# Altium PCB ROV_Voltage_Switch_1.1.PcbDoc (part 3 of 3)
Units mm, origin at the board's own origin, x right, y up, seen from the top; angles counter-clockwise.
Board outline 250 x 141 mm, 2 copper layers (Top Layer, Bottom Layer); 262 components, 176 nets, 724 pads, 155 vias.
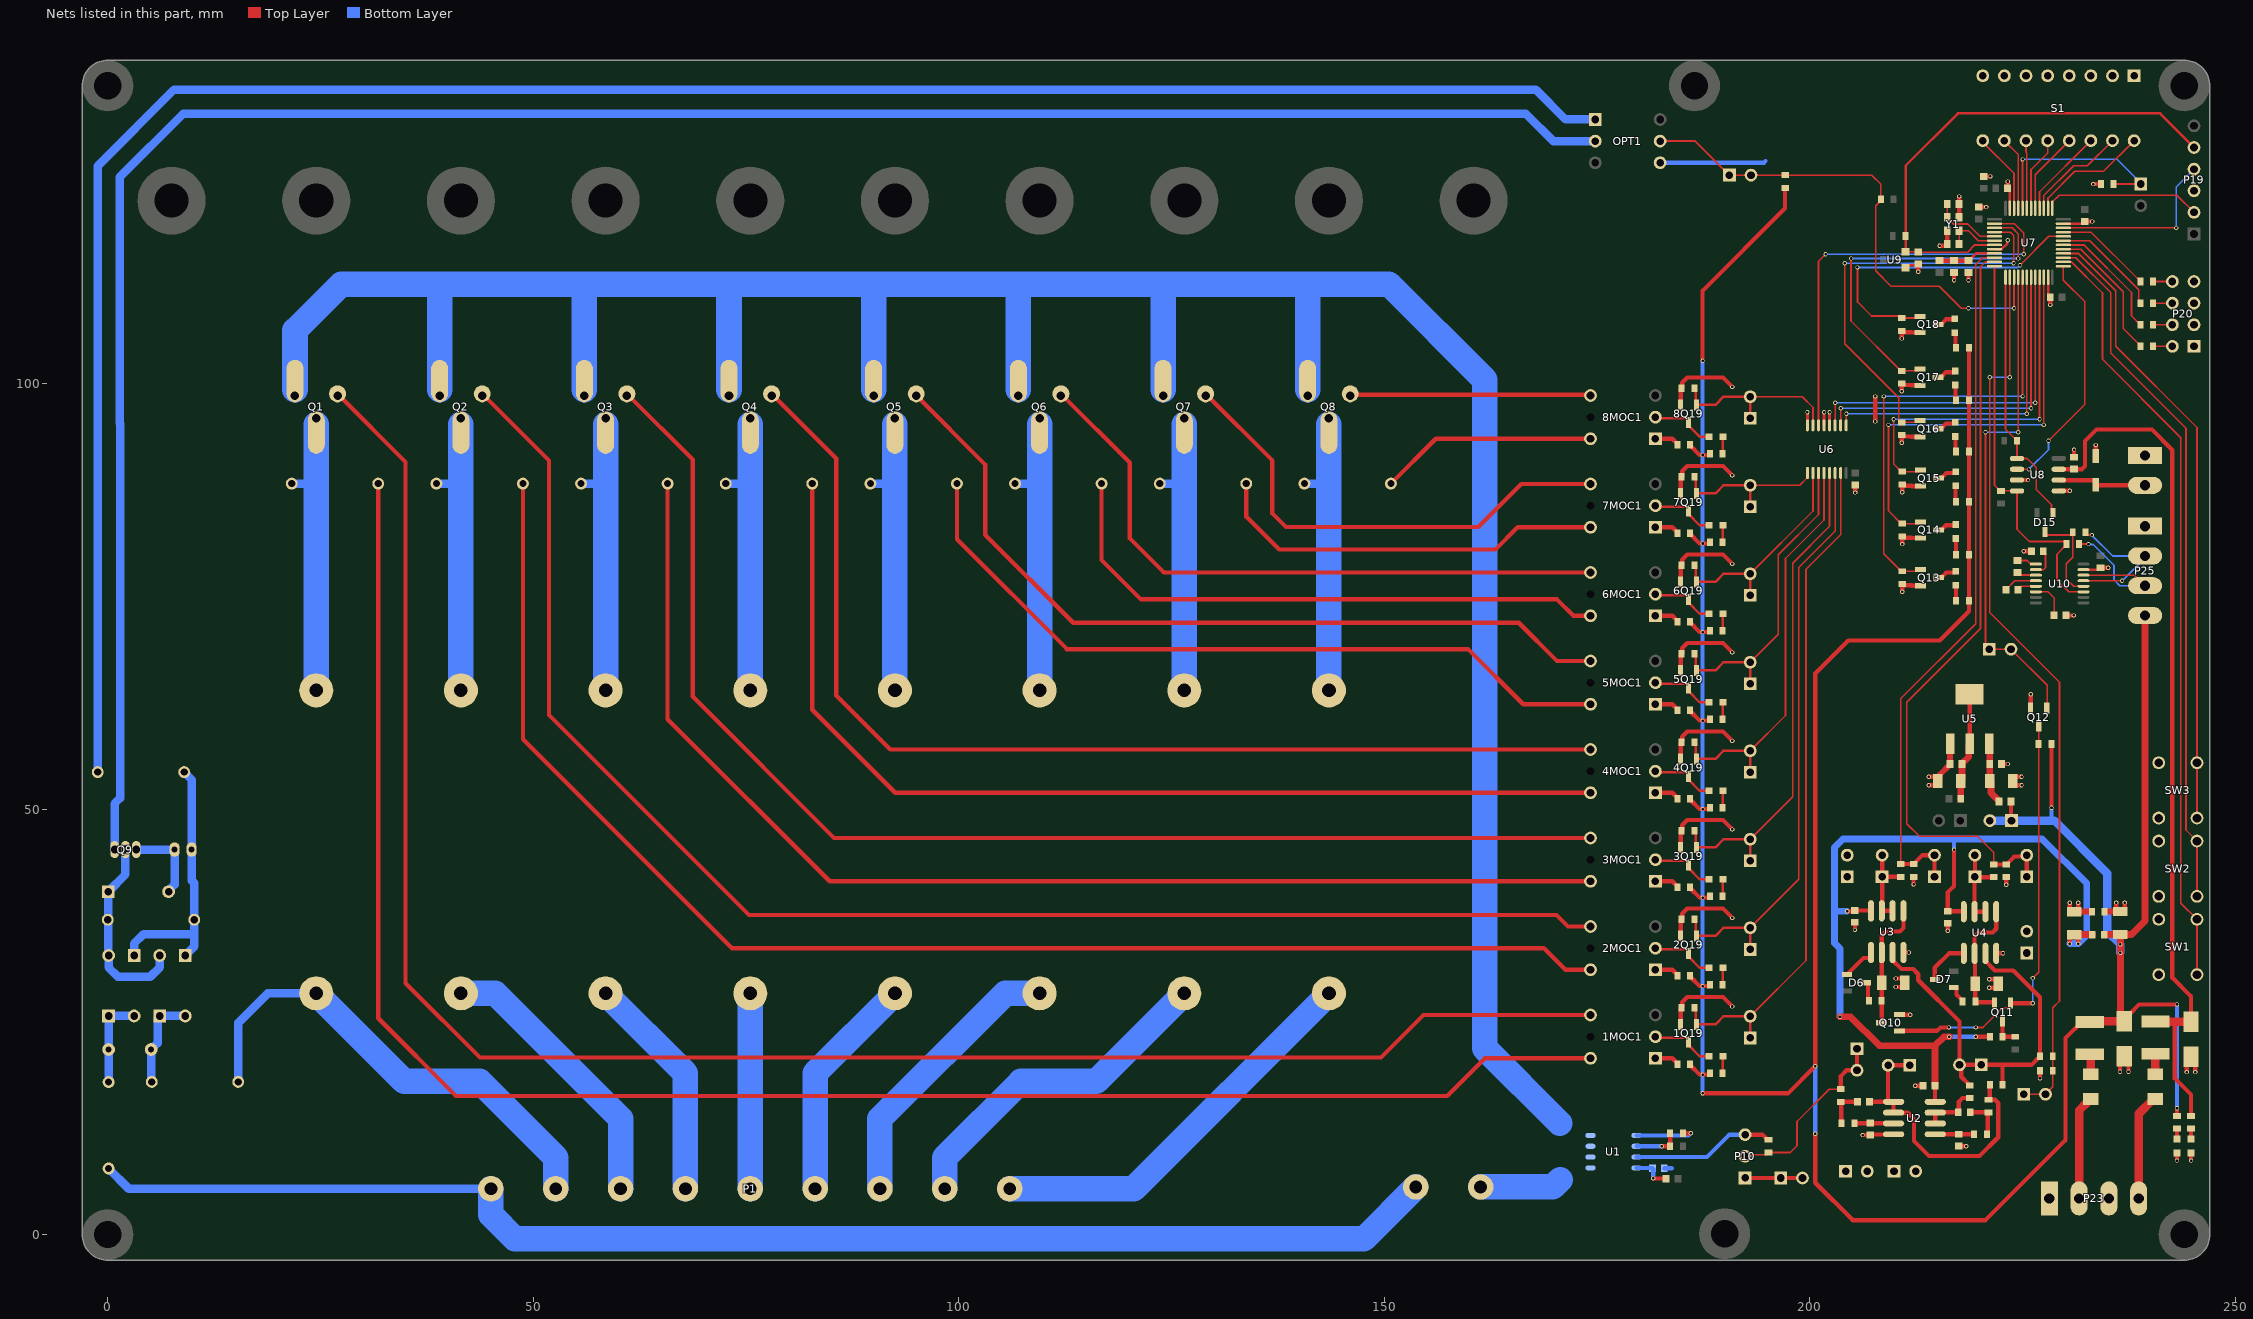
[diagram p2: the nets of this part, all layers, seen from the top]

## Via types
v1: diameter 0.5, hole 0.3, Top Layer to Bottom Layer, tented both sides, 155 vias

## Nets (pads, with @x,y where several pads share a name; then routed paths per layer and width w, separated by ;. In a path a pad name is that pad's centre, name@x,y a point inside that pad or via, vN(x,y) a via of type N, cw(c..) or ccw(c..) an arc to the next point about the centre after c; other vN are vias at no path point) (continued)
+5V: 1R60.2 1R61.2 2R60.2 2R61.2 3R60.2 3R61.2 4R60.2 4R61.2 5R60.2 5R61.2 6R60.2 6R61.2 7R60.2 7R61.2 8R60.2 8R61.2 C4.2 D13.2 F10.2 L2.1 L3.1 P21.1 P21.2 P25.4 R12.1 R29.2 R40.2 R45.2 R46.2 R47.2 R48.2 R49.2 R50.2 | length 426.3
  Top Layer w0.3: F10.2@233.55,25 F10.2@233.85,25
  Top Layer w0.4: R12.1@197.1,123 R12.1@197.2,123
  Top Layer w0.5: 1R61.2@185.95,20.01 185.95,19.91 187.05,18.81 v1(187.4,18.81) 188.1,18.81 1R60.2@188.25,18.96 ; 2R61.2@185.95,30.41 185.95,30.31 187.05,29.21 v1(187.4,29.21) 188.1,29.21 2R60.2@188.25,29.36 ; 3R61.2@185.95,40.81 185.95,40.71 187.05,39.61 v1(187.4,39.61) 188.1,39.61 3R60.2@188.25,39.76 ; 4R61.2@185.95,51.21 185.95,51.11 187.05,50.01 v1(187.4,50.01) 188.1,50.01 4R60.2@188.25,50.16 ; 5R61.2@185.95,61.61 185.95,61.51 187.05,60.41 v1(187.4,60.41) 188.1,60.41 5R60.2@188.25,60.56 ; 6R61.2@185.95,72.01 185.95,71.91 187.05,70.81 v1(187.4,70.81) 188.1,70.81 6R60.2@188.25,70.96 ; 7R61.2@185.95,82.41 185.95,82.31 187.05,81.21 v1(187.4,81.21) 188.1,81.21 7R60.2@188.25,81.36 ; 8R61.2@185.95,92.81 185.95,92.71 187.05,91.61 v1(187.4,91.61) 188.1,91.61 8R60.2@188.25,91.76 ; v1(187.4,16.6) 197.45,16.6 v1(200.65,19.8) 200.65,65.95 204.525,69.825 215.275,69.825 218.7,73.25 R45.2@218.7,74.5 R46.2@218.7,79.9 R47.2@218.7,86.1 R48.2@218.7,92.025 R49.2@218.7,98.05 R50.2@218.7,104.2 ; v1(187.4,102.7) 187.4,110.9 197.1,120.6 R12.1@197.1,123 ; v1(200.65,11.85) 200.65,6.1 205.05,1.7 220.65,1.7 230.05,11.1 230.05,23.1 F10.2@231.95,25 ; L3.1@223.65,50.9 223.65,48.7 P21.1@223.7,48.65 ; v1(228.4,50.15) R29.2@228.4,57.65 ; D13.2@236.95,25.05 236.95,25.35 237.6,26 237.65,26 238.7,27.05 v1(243.15,27.05) ; R40.2@243.15,13.95 v1(243.15,14.85)
  Top Layer w0.8: L2.1@234.6,35.25 234.6,35.26 236.49,35.26 C4.2@236.5,35.27 ; D13.2@236.95,25.05 236.5,25.5 v1(236.5,33.1) C4.2@236.5,35.27 ; P25.4@239.4,72.75 239.4,36.85 237.82,35.27 C4.2@236.5,35.27
  Top Layer w1: F10.2@231.95,25 F10.2@232.9,25 ; F10.2@232.8,25.05 F10.2@233.6,25.05 ; F10.2@232.875,25.025 F10.2@232.9,25 ; F10.2@233.75,25.2 F10.2@233.6,25.05 ; D13.2@236.95,25.05 F10.2@233.6,25.05 ; F10.2@232.9,25 233.55,25 F10.2@233.6,25.05
  Bottom Layer w0.5: v1(187.4,16.6) v1(187.4,18.81) v1(187.4,29.21) v1(187.4,39.61) v1(187.4,50.01) v1(187.4,60.41) v1(187.4,70.81) v1(187.4,81.21) v1(187.4,91.61) v1(187.4,102.7) ; v1(200.65,11.85) v1(200.65,19.8) ; v1(228.4,50.15) 228.4,49 228.75,48.65 ; v1(243.15,14.85) v1(243.15,27.05)
  Bottom Layer w1: P21.2@221.16,48.65 P21.1@223.7,48.65 228.75,48.65 234.95,42.45 234.95,35.65 v1(236.5,34.1) v1(236.5,33.1)
+5V_A: C5.2 C6.2 C11.2 C13.2 L2.2 R34.1 U2.8 U3.8 U4.8 | length 107.2
  Top Layer w0.5: v1(204.4,38) 205.2,38 C11.2@205.3,38.1 207.145,38.1 U3.8@207.195,38.05 ; C6.2@214.7,17.5 214.7,15.655 U2.8@214.75,15.605 ; v1(216.95,45.25) 216.95,40.95 216.2,40.2 C13.2@216.2,38 218.045,38 U4.8@218.095,37.95 ; v1(219.5,23.25) R34.1@221.15,23.25 ; v1(230.55,34.2) 230.55,34.95 C5.2@230.825,35.225 ; v1(231.55,34.2) 231.55,34.95 231.25,35.25 C5.2@231.05,35.25 ; C5.2@230.825,35.225 230.85,35.25 C5.2@231.05,35.25 ; C5.2@230.825,35.225 231.025,35.225 C5.2@231.05,35.25
  Top Layer w0.8: v1(203.55,25.6) 204.8,25.6 208.2,22.2 214.7,22.2 ; C6.2@214.7,17.5 214.7,22.2 ; v1(216.4,23.25) 215.75,23.25 214.7,22.2 ; C5.2@231.05,35.25 231.25,35.25 L2.2@233.2,35.25
  Bottom Layer w0.5: v1(216.4,23.25) v1(219.5,23.25) ; v1(216.95,45.25) 216.95,46.45 217,46.5
  Bottom Layer w0.8: v1(203.55,25.6) 203.55,33.6 202.9,34.25 202.9,38 ; v1(204.4,38) 202.9,38 ; v1(230.55,34.2) v1(231.55,34.2) 232.55,35.2 232.55,41.25 227.3,46.5 217,46.5 203.9,46.5 202.9,45.5 202.9,38
+12V: C20.2 D11.2 F9.2 R41.2 U8.7 | length 102.2
  Top Layer w0.5: U8.7@229.25,89.935 229.265,89.95 C20.2@231.05,89.95 232,89.95 232.35,90.3 232.35,93.25 233.7,94.6 240.2,94.6 242.6,92.2 242.6,30.2 244.8,28 D11.2@244.8,25 ; 242.9,25 242.9,18.35 244.8,16.45 R41.2@244.8,13.95
  Top Layer w1: F9.2@240.6,25.05 240.65,25 242.9,25 D11.2@244.8,25
BOOT: P26.1 R53.1 U7.44 | length 23.2
  Top Layer w0.2: U7.44@225,120.6 v1(225,126.35) ; R53.1@235.7,123.45 P26.1@238.89,123.45
  Bottom Layer w0.2: v1(225,126.35) 236.1,126.35 P26.1@238.33,124.12
CHANEL_1_AFTER_FUSE: F1.2 Q1.2 R1.2 | length 34.2
  Bottom Layer w1: R1.2@21.62,88.25 24.45,88.25 24.5,88.3
  Bottom Layer w3: F1.2@24.5,63.95 24.5,88.3 Q1.2@24.5,95.25
CHANEL_1_BEFORE_FUSE: F1.1 P1.2 R13.1 | length 57.3
  Bottom Layer w1: R13.1@15.33,17.95 15.33,24.88 18.8,28.35 F1.1@24.5,28.35
  Bottom Layer w3: F1.1@24.5,28.35 34.85,18 43.7,18 52.64,9.06 P1.2@52.64,5.4
CHANEL_2_AFTER_FUSE: F2.2 Q2.2 R2.2 | length 34.2
  Bottom Layer w1: R2.2@38.62,88.25 41.45,88.25 41.5,88.3
  Bottom Layer w3: F2.2@41.5,63.95 41.5,88.3 Q2.2@41.5,95.25
CHANEL_2_BEFORE_FUSE: F2.1 P1.3 | length 33.1
  Bottom Layer w3: F2.1@41.5,28.35 45.55,28.35 60.26,13.64 P1.3@60.26,5.4
CHANEL_3_AFTER_FUSE: F3.2 Q3.2 R3.2 | length 34.2
  Bottom Layer w1: R3.2@55.62,88.25 58.45,88.25 58.5,88.3
  Bottom Layer w3: F3.2@58.5,63.95 58.5,88.3 Q3.2@58.5,95.25
CHANEL_3_BEFORE_FUSE: F3.1 P1.4 | length 26.8
  Bottom Layer w3: F3.1@58.5,28.35 67.88,18.97 P1.4@67.88,5.4
CHANEL_4_AFTER_FUSE: F4.2 Q4.2 R4.2 | length 34.2
  Bottom Layer w1: R4.2@72.62,88.25 75.45,88.25 75.5,88.3
  Bottom Layer w3: F4.2@75.5,63.95 75.5,88.3 Q4.2@75.5,95.25
CHANEL_4_BEFORE_FUSE: F4.1 P1.5 | length 22.9
  Bottom Layer w3: P1.5@75.5,5.4 F4.1@75.5,28.35
CHANEL_5_AFTER_FUSE: F5.2 Q5.2 R5.2 | length 34.2
  Bottom Layer w1: R5.2@89.62,88.25 92.45,88.25 92.5,88.3
  Bottom Layer w3: F5.2@92.5,63.95 92.5,88.3 Q5.2@92.5,95.25
CHANEL_5_BEFORE_FUSE: F5.1 P1.6 | length 26.8
  Bottom Layer w3: P1.6@83.12,5.4 83.12,18.97 F5.1@92.5,28.35
CHANEL_6_AFTER_FUSE: F6.2 Q6.2 R6.2 | length 34.2
  Bottom Layer w1: R6.2@106.62,88.25 109.45,88.25 109.5,88.3
  Bottom Layer w3: F6.2@109.5,63.95 109.5,88.3 Q6.2@109.5,95.25
CHANEL_6_BEFORE_FUSE: F6.1 P1.7 | length 33.1
  Bottom Layer w3: P1.7@90.74,5.4 90.74,13.64 105.45,28.35 F6.1@109.5,28.35
CHANEL_7_AFTER_FUSE: F7.2 Q7.2 R7.2 | length 34.2
  Bottom Layer w1: R7.2@123.62,88.25 126.45,88.25 126.5,88.3
  Bottom Layer w3: F7.2@126.5,63.95 126.5,88.3 Q7.2@126.5,95.25
CHANEL_7_BEFORE_FUSE: F7.1 P1.8 | length 39.8
  Bottom Layer w3: P1.8@98.36,5.4 98.36,9.06 107.3,18 116.15,18 F7.1@126.5,28.35
CHANEL_8_AFTER_FUSE: F8.2 Q8.2 R8.2 | length 34.2
  Bottom Layer w1: R8.2@140.62,88.25 143.45,88.25 143.5,88.3
  Bottom Layer w3: F8.2@143.5,63.95 143.5,88.3 Q8.2@143.5,95.25
CHANEL_8_BEFORE_FUSE: F8.1 P1.9 | length 47
  Bottom Layer w3: P1.9@105.98,5.4 120.55,5.4 F8.1@143.5,28.35
CHANEL_CONTROL_1: 1P27.1 1P27.2 1Q19.1 1R62.2 U6.15 | length 79.5
  Top Layer w0.2: 1P27.2@193,25.66 199.55,32.21 199.55,78.2 203.625,82.275 U6.15@203.625,89.5
  Top Layer w0.3: 1R62.2@186.45,26.66 186.575,26.535 186.575,24.835 1Q19.1@186.7,24.71 188.9,24.71 189.85,25.66 1P27.2@193,25.66 1P27.1@193,23.12
CHANEL_CONTROL_2: 2P27.1 2P27.2 2Q19.1 2R62.2 U6.14 | length 68.9
  Top Layer w0.2: 2P27.2@193,36.06 198.7,41.76 198.7,78.4 202.975,82.675 U6.14@202.975,89.5
  Top Layer w0.3: 2R62.2@186.45,37.06 186.575,36.935 186.575,35.235 2Q19.1@186.7,35.11 188.9,35.11 189.85,36.06 2P27.2@193,36.06 2P27.1@193,33.52
CHANEL_CONTROL_3: 3P27.1 3P27.2 3Q19.1 3R62.2 U6.13 | length 58.2
  Top Layer w0.2: 3P27.2@193,46.46 198,51.46 198,78.9 202.325,83.225 U6.13@202.325,89.5
  Top Layer w0.3: 3R62.2@186.45,47.46 186.575,47.335 186.575,45.635 3Q19.1@186.7,45.51 188.9,45.51 189.85,46.46 3P27.2@193,46.46 3P27.1@193,43.92
CHANEL_CONTROL_4: 4P27.1 4P27.2 4Q19.1 4R62.2 U6.12 | length 47.5
  Top Layer w0.2: 4P27.2@193,56.86 197.15,61.01 197.15,79.45 201.675,83.975 U6.12@201.675,89.5
  Top Layer w0.3: 4R62.2@186.45,57.86 186.575,57.735 186.575,56.035 4Q19.1@186.7,55.91 188.9,55.91 189.85,56.86 4P27.2@193,56.86 4P27.1@193,54.32
CHANEL_CONTROL_5: 5P27.1 5P27.2 5Q19.1 5R62.2 U6.11 | length 36.9
  Top Layer w0.2: 5P27.2@193,67.26 196.3,70.56 196.3,79.9 201.025,84.625 U6.11@201.025,89.5
  Top Layer w0.3: 5R62.2@186.45,68.26 186.575,68.135 186.575,66.435 5Q19.1@186.7,66.31 188.9,66.31 189.85,67.26 5P27.2@193,67.26 5P27.1@193,64.72
CHANEL_CONTROL_6: 6P27.1 6P27.2 6Q19.1 6R62.2 U6.10 | length 26.2
  Top Layer w0.2: 6P27.2@193,77.66 200.375,85.035 U6.10@200.375,89.5
  Top Layer w0.3: 6R62.2@186.45,78.66 186.575,78.535 186.575,76.835 6Q19.1@186.7,76.71 188.9,76.71 189.85,77.66 6P27.2@193,77.66 6P27.1@193,75.12
CHANEL_CONTROL_7: 7P27.1 7P27.2 7Q19.1 7R62.2 U6.9 | length 18.9
  Top Layer w0.2: 7P27.2@193,88.06 198.81,88.06 199.725,88.975 U6.9@199.725,89.5 U6.9@199.712,89.487
  Top Layer w0.3: 7R62.2@186.45,89.06 186.575,88.935 186.575,87.235 7Q19.1@186.7,87.11 188.9,87.11 189.85,88.06 7P27.2@193,88.06 7P27.1@193,85.52
CHANEL_CONTROL_8: 8P27.1 8P27.2 8Q19.1 8R62.2 U6.7 | length 21.3
  Top Layer w0.2: 8P27.2@193,98.46 199.115,98.46 200.375,97.2 U6.7@200.375,95.1
  Top Layer w0.3: 8R62.2@186.45,99.46 186.575,99.335 186.575,97.635 8Q19.1@186.7,97.51 188.9,97.51 189.85,98.46 8P27.2@193,98.46 8P27.1@193,95.92
DECODER_A0: U6.1 U7.18 | length 38.6
  Top Layer w0.2: U6.1@204.275,95.1 204.3,95.125 v1(204.3,96.45) ; v1(225.5,96.45) U7.18@225.5,112.5
  Bottom Layer w0.2: v1(204.3,96.45) v1(225.5,96.45)
DECODER_A1: U6.2 U7.19 | length 39.7
  Top Layer w0.2: U6.2@203.65,95.125 v1(203.65,97.1) ; v1(226,97.1) 226,97.65 U7.19@226,112.5
  Bottom Layer w0.2: v1(203.65,97.1) v1(226,97.1)
DECODER_A2: U6.3 U7.20 | length 40.9
  Top Layer w0.2: U6.3@203,95.125 v1(203,97.75) ; v1(226.5,97.75) U7.20@226.5,112.5
  Bottom Layer w0.2: v1(203,97.75) v1(226.5,97.75)
DEMUX_OUTPUT_ENABLE: U6.6 U7.2 | length 50.1
  Top Layer w0.2: U6.6@201.025,95.1 201.025,114.375 v1(201.85,115.2) ; U7.2@221.7,118.8 224.05,118.8 225.15,117.7 v1(225.15,115.2)
  Bottom Layer w0.2: v1(201.85,115.2) v1(225.15,115.2)
DIP8_1: S1.9 U7.46 | length 9.5
  Top Layer w0.2: S1.9@220.33,128.55 220.33,128.37 224,124.7 U7.46@224,120.6
DIP8_2: S1.10 U7.45 | length 8.6
  Top Layer w0.2: S1.10@222.87,128.55 224.5,126.92 U7.45@224.5,120.6
DIP8_3: S1.11 U7.43 | length 8
  Top Layer w0.2: S1.11@225.41,128.55 225.41,127.19 225.5,127.1 225.5,123.773 U7.43@225.5,120.6
DIP8_4: S1.12 U7.42 | length 8.8
  Top Layer w0.2: U7.42@226,120.6 226,125.15 227.95,127.1 S1.12@227.95,128.55
DIP8_5: S1.13 U7.41 | length 9.6
  Top Layer w0.2: U7.41@226.5,120.6 226.5,124.56 S1.13@230.49,128.55
DIP8_6: S1.14 U7.40 | length 10.4
  Top Layer w0.2: U7.40@227,120.6 227,122.52 S1.14@233.03,128.55
DIP8_7: S1.15 U7.39 | length 12.2
  Top Layer w0.2: U7.39@227.5,120.6 227.5,122.1 231,125.6 232.62,125.6 S1.15@235.57,128.55
DIP8_8: S1.16 U7.38 | length 14.1
  Top Layer w0.2: U7.38@228,120.6 228,121.8 231.15,124.95 234.51,124.95 S1.16@238.11,128.55
GND: 1Q19.2 1R62.1 2Q19.2 2R62.1 3Q19.2 3R62.1 4Q19.2 4R62.1 5Q19.2 5R62.1 6Q19.2 6R62.1 7Q19.2 7R62.1 8Q19.2 8R62.1 C1.1 C4.1 C15.1 C16.1 C17.1 C18.1 C19.1 C20.1 C21.1 C22.1 C23.1 C24.1 C25.1 C26.1 C27.1 C30.1 C31.2 C32.2 C33.1 C34.1 C35.1 D8.2 D9.2 D11.1 D13.1 D14.1 OPT1.4 P19.3 P20.1 P20.3 P20.5 P20.7 P23.1 P23.3 P24.1 P25.1 Q12.2 Q13.2 Q14.2 Q15.2 Q16.2 Q17.2 Q18.2 R10.1 R17.2 R53.2 R54.1 R55.1 R56.1 R57.1 R58.1 R59.1 S1.1 S1.2 S1.3 S1.4 S1.5 S1.6 S1.7 S1.8 SW1.1 SW1.2 SW2.1 SW2.2 SW3.1 SW3.2 U1.5 U5.1 U6.4 U6.5 U6.8 U7.8 U7.23 U7.35 U7.47 U8.3 U8.5 U9.1 U10.15 Y1.2 Y1.4 | length 182.2
  Top Layer w0.3: U9.1@211.25,113.6 211.55,113.9 212.75,113.9 C21.1@212.85,113.9 ; U7.8@221.7,115.8 222.554,115.8 223.212,116.458 223.212,116.812 v1(223.25,116.85) ; C24.1@223.15,122.95 223.5,122.6 U7.47@223.5,120.6 ; U7.23@228,112.5 228,110.4 C25.1@228.25,110.15 ; U7.35@229.8,118.8 232.05,118.8 C22.1@232.3,119.05 ; U10.15@232.162,78.138 232.172,78.147 233.947,78.147 C27.1@234.162,78.363
  Top Layer w0.35: U6.8@199.725,95.1 v1(199.725,96.625) ; U6.5@201.675,95.1 v1(201.675,96.625) ; U6.4@202.325,95.1 v1(202.325,96.625)
  Top Layer w0.5: 1Q19.2@184.8,24.71 184.85,24.76 184.85,26.56 1R62.1@184.95,26.66 185,26.71 185,27.31 185.6,27.91 189.8,27.91 v1(190.9,26.81) ; 2Q19.2@184.8,35.11 184.85,35.16 184.85,36.96 2R62.1@184.95,37.06 185,37.11 185,37.71 185.6,38.31 189.8,38.31 v1(190.9,37.21) ; 3Q19.2@184.8,45.51 184.85,45.56 184.85,47.36 3R62.1@184.95,47.46 185,47.51 185,48.11 185.6,48.71 189.8,48.71 v1(190.9,47.61) ; 4Q19.2@184.8,55.91 184.85,55.96 184.85,57.76 4R62.1@184.95,57.86 185,57.91 185,58.51 185.6,59.11 189.8,59.11 v1(190.9,58.01) ; 5Q19.2@184.8,66.31 184.85,66.36 184.85,68.16 5R62.1@184.95,68.26 185,68.31 185,68.91 185.6,69.51 189.8,69.51 v1(190.9,68.41) ; 6Q19.2@184.8,76.71 184.85,76.76 184.85,78.56 6R62.1@184.95,78.66 185,78.71 185,79.31 185.6,79.91 189.8,79.91 v1(190.9,78.81) ; 7Q19.2@184.8,87.11 184.85,87.16 184.85,88.96 7R62.1@184.95,89.06 185,89.11 185,89.71 185.6,90.31 189.8,90.31 v1(190.9,89.21) ; 8Q19.2@184.8,97.51 184.85,97.56 184.85,99.36 8R62.1@184.95,99.46 185,99.51 185,100.11 185.6,100.71 189.8,100.71 v1(190.9,99.61) ; R10.1@185.1,11.9 v1(186,11.9) ; v1(205.35,87.2) C15.1@205.35,88.1 ; v1(207.7,95.55) v1(207.7,98.5) ; v1(210.8,93.05) R57.1@210.8,93.95 ; v1(210.8,99.1) R58.1@210.8,100 ; v1(210.8,105.3) R59.1@210.8,106.2 ; v1(210.85,75.55) R54.1@210.85,76.45 ; v1(210.85,81.15) R55.1@210.85,82.05 ; v1(210.85,87.25) R56.1@210.85,88.15 ; R57.1@210.95,93.8 211.9,93.8 211.95,93.75 Q16.2@212.95,93.75 ; R58.1@210.95,99.85 211.9,99.85 211.95,99.8 Q17.2@212.95,99.8 ; R59.1@210.95,106.05 211.9,106.05 211.95,106 Q18.2@212.95,106 ; R54.1@211,76.3 211.95,76.3 212,76.25 Q13.2@213,76.25 ; R55.1@211,81.9 211.95,81.9 212,81.85 Q14.2@213,81.85 ; R56.1@211,88 211.95,88 212,87.95 Q15.2@213,87.95 ; v1(212.75,113.15) 212.75,113.9 C21.1@212.75,114.05 ; v1(213.986,52.804) 214.736,52.804 215.036,53.104 C18.1@215.036,53.304 215.036,53.504 214.736,53.804 v1(213.986,53.804) ; v1(215.25,116.2) 215.95,116.2 C32.2@216.15,116.4 Y1.2@216.15,117.95 ; v1(216.95,112.15) C33.1@216.95,113.05 ; Y1.4@217.55,119.55 C31.2@217.55,121.1 v1(217.55,122) ; v1(218.65,112.15) C34.1@218.65,113.05 ; C26.1@219.85,120.75 v1(220.75,120.75) ; C23.1@220.425,124.35 v1(221.225,124.35) ; C17.1@222.536,55.304 v1(223.286,55.304) ; C24.1@223.25,122.95 v1(223.25,123.75) ; U8.3@224.355,88.67 v1(225.65,88.67) ; v1(224.886,52.804) 224.136,52.804 223.836,53.104 C16.1@223.836,53.304 223.836,53.504 224.136,53.804 v1(224.886,53.804) ; v1(225.137,80.288) C30.1@226.038,80.288 ; Q12.2@225.95,61.85 v1(225.95,63.5) ; v1(228.25,109.25) C25.1@228.25,110.15 ; U8.5@229.25,87.395 229.255,87.4 v1(230.55,87.4) ; C35.1@230.112,72.762 v1(231.013,72.762) ; C20.1@231.05,91.35 v1(231.05,92.25) ; C22.1@232.3,119.05 v1(233.2,119.05) ; v1(233.3,123.45) R53.2@234.2,123.45 ; D14.1@233.6,91.5 v1(233.6,92.795) ; C27.1@234.162,78.363 v1(235.063,78.363) ; v1(236,39.02) 236,38.27 236.3,37.97 C4.1@236.5,37.97 236.7,37.97 237,38.27 v1(237,39.02) ; v1(236.45,19.15) 236.45,20.45 D13.1@236.95,20.95 237.45,20.45 v1(237.45,19.15) ; v1(243.15,8.7) D8.2@243.15,9.6 ; v1(244.3,19.1) 244.3,20.4 D11.1@244.8,20.9 245.3,20.4 v1(245.3,19.1) ; v1(244.8,8.7) D9.2@244.8,9.6
  Top Layer w0.7: C18.1@215.036,53.304 215.236,53.504 215.236,54.004 216.486,55.254 C19.1@216.486,55.304 U5.1@216.486,57.704 ; R17.2@234.66,37.96 C4.1@236.49,37.96
  Top Layer w0.8: C4.1@236.49,37.96 C4.1@236.5,37.97
  Bottom Layer w0.5: U1.5@179.63,11.655 179.635,11.65 185.75,11.65 v1(186,11.9) ; OPT1.4@182.41,125.96 194.61,125.96 194.8,126.15 ; C1.1@182.905,7.795 183.77,7.795
GND_A: C5.1 C6.1 C9.2 C10.2 C11.1 C12.1 C13.1 C14.1 P4.1 P4.2 P5.1 P5.2 P14.1 P14.2 P18.1 P18.2 Q10.2 R17.1 R26.2 R30.2 R33.2 U2.4 U3.4 U4.4 | length 23
  Top Layer w0.5: v1(205.3,35.8) C11.1@205.3,36.7 ; v1(206.2,11.7) C9.2@207.1,11.7 207.157,11.757 209.812,11.757 U2.4@209.85,11.795 ; v1(210.1,29.1) 210.85,29.1 211.15,29.4 C12.1@211.15,29.6 211.15,29.8 210.85,30.1 v1(210.1,30.1) ; Q10.2@210.55,25.85 v1(211.8,25.85) ; U3.4@211,33.145 U3.4@211.005,33.15 v1(211.65,33.15) ; v1(212.2,41.15) R30.2@212.2,42.05 ; v1(212.4,17.5) C6.1@213.3,17.5 ; v1(216.2,35.7) C13.1@216.2,36.6 ; C10.2@217.5,10.4 v1(218.4,10.4) ; v1(221.1,29) 221.85,29 222.15,29.3 C14.1@222.15,29.5 222.15,29.7 221.85,30 v1(221.1,30) ; U4.4@221.91,33.055 v1(222.705,33.055) ; v1(223.1,41.1) R33.2@223.1,42 ; v1(227.05,18.35) R26.2@227.05,19.25 ; v1(230.55,39) 230.55,38.25 230.85,37.95 C5.1@231.05,37.95 231.25,37.95 231.55,38.25 v1(231.55,39)
  Top Layer w0.7: C5.1@231.05,37.95 R17.1@233.15,37.95
HEADER_AUX_1: R36.1 U7.29 | length 16.4
  Top Layer w0.2: U7.29@229.8,115.8 231.85,115.8 236.85,110.8 236.85,106.48 238.85,104.48 R36.1@238.85,104.38
HEADER_AUX_2: R37.1 U7.30 | length 14.5
  Top Layer w0.2: U7.30@229.8,116.3 232.2,116.3 237.8,110.7 237.8,107.97 R37.1@238.85,106.92
HEADER_AUX_3: R38.1 U7.31 | length 12.9
  Top Layer w0.2: U7.31@229.8,116.8 232.9,116.8 238.65,111.05 238.65,109.66 R38.1@238.85,109.46
HEADER_AUX_4: R39.1 U7.33 | length 11.5
  Top Layer w0.2: U7.33@229.8,117.8 233.05,117.8 238.5,112.35 238.6,112.35 238.85,112.1 R39.1@238.85,112
LIN_CS: U7.25 U8.2 | length 29
  Top Layer w0.2: U8.2@224.35,89.935 225.685,89.935 225.7,89.92 v1(225.75,89.92) ; v1(228.05,93.3) 232.3,97.55 232.3,109.65 229.8,112.15 U7.25@229.8,113.8
  Bottom Layer w0.2: v1(225.75,89.92) 228.05,92.22 v1(228.05,93.3)
LIN_DATA: D14.2 P24.2 U8.6 | length 10.6
  Top Layer w0.5: U8.6@229.25,88.665 229.265,88.65 233.45,88.65 233.6,88.5 D14.2@233.6,88.1 233.65,88.05 P24.2@239.4,88.05
MCU_LED_1: Q13.1 R54.2 U7.17 | length 54
  Top Layer w0.2: v1(208.7,98.5) 208.7,80 210.75,77.95 R54.2@210.85,77.95 212.8,77.95 Q13.1@213,78.15 ; v1(225,98.5) U7.17@225,112.5
  Bottom Layer w0.2: v1(208.7,98.5) v1(225,98.5)
MCU_LED_2: Q14.1 R55.2 U7.22 | length 50.2
  Top Layer w0.2: v1(209.25,95.15) 209.25,85.05 210.75,83.55 R55.2@210.85,83.55 212.8,83.55 Q14.1@213,83.75 ; v1(227.5,95.15) U7.22@227.5,112.5
  Bottom Layer w0.2: v1(209.25,95.15) v1(227.5,95.15)
MCU_LED_3: Q15.1 R56.2 U7.21 | length 42.7
  Top Layer w0.2: v1(209.85,95.8) 209.85,90.55 210.75,89.65 R56.2@210.85,89.65 212.8,89.65 Q15.1@213,89.85 ; v1(227,95.8) U7.21@227,112.5
  Bottom Layer w0.2: v1(209.85,95.8) v1(227,95.8)
MCU_LED_4: Q16.1 R57.2 U7.4 | length 49.3
  Top Layer w0.2: v1(204.1,114.15) 204.1,104.7 210.45,98.35 210.45,95.7 210.7,95.45 R57.2@210.8,95.45 212.75,95.45 Q16.1@212.95,95.65 ; U7.4@221.7,117.8 223.55,117.8 223.95,117.4 v1(223.95,114.15)
  Bottom Layer w0.2: v1(204.1,114.15) v1(223.95,114.15)
MCU_LED_5: Q17.1 R58.2 U7.3 | length 42.9
  Top Layer w0.2: v1(204.85,114.7) 204.85,107.35 210.7,101.5 R58.2@210.8,101.5 212.75,101.5 Q17.1@212.95,101.7 ; U7.3@222.4,118.3 223.775,118.3 224.5,117.575 v1(224.5,114.7)
  Bottom Layer w0.2: v1(204.85,114.7) v1(224.5,114.7)
MCU_LED_6: Q18.1 R59.2 U7.32 | length 38
  Top Layer w0.2: v1(205.6,113.65) 205.6,109.6 207.25,107.95 210.55,107.95 R59.2@210.8,107.7 212.75,107.7 Q18.1@212.95,107.9 ; v1(224.7,113.9) 228.1,117.3 U7.32@229.8,117.3
  Bottom Layer w0.2: v1(205.6,113.65) 224.45,113.65 v1(224.7,113.9)
Net1D22_1: 1D22.1 1R60.1 | length 2
  Top Layer w0.3: 1R60.1@189.75,18.96 189.775,18.985 189.775,20.935 1D22.1@189.8,20.96
Net1D22_2: 1D22.2 1MOC1.2 1Q19.3 | length 7.7
  Top Layer w0.3: 1MOC1.2@181.86,23.26 182.01,23.11 185.6,23.11 185.75,22.96 1Q19.3@185.75,22.61 185.75,22.26 187.05,20.96 1D22.2@188.15,20.96
Net1MOC1_1: 1MOC1.1 1R61.1 | length 2.9
  Top Layer w0.5: 1MOC1.1@181.86,20.72 183.84,20.72 184.45,20.11 1R61.1@184.45,20.01
Net1MOC1_4: 1MOC1.4 Q1.3 | length 217.4
  Top Layer w0.5: Q1.3@27,98.6 27.2,98.6 35,90.8 35,29.547 43.747,20.8 149.6,20.8 154.6,25.8 1MOC1.4@174.24,25.8
Net1MOC1_6: 1MOC1.6 R1.1 | length 210.9
  Top Layer w0.5: R1.1@31.78,88.25 31.78,25.42 40.9,16.3 157.4,16.3 161.82,20.72 1MOC1.6@174.24,20.72
Net2D22_1: 2D22.1 2R60.1 | length 2
  Top Layer w0.3: 2R60.1@189.75,29.36 189.775,29.385 189.775,31.335 2D22.1@189.8,31.36
Net2D22_2: 2D22.2 2MOC1.2 2Q19.3 | length 7.7
  Top Layer w0.3: 2MOC1.2@181.86,33.66 182.01,33.51 185.6,33.51 185.75,33.36 2Q19.3@185.75,33.01 185.75,32.66 187.05,31.36 2D22.2@188.15,31.36
Net2MOC1_1: 2MOC1.1 2R61.1 | length 2.9
  Top Layer w0.5: 2MOC1.1@181.86,31.12 183.84,31.12 184.45,30.51 2R61.1@184.45,30.41
Net2MOC1_4: 2MOC1.4 Q2.3 | length 173.6
  Top Layer w0.5: Q2.3@44,98.6 44.2,98.6 51.85,90.95 51.85,61.05 75.35,37.55 170.25,37.55 171.6,36.2 2MOC1.4@174.24,36.2
Net2MOC1_6: 2MOC1.6 R2.1 | length 166.7
  Top Layer w0.5: R2.1@48.78,88.25 48.78,58.22 73.35,33.65 168.75,33.65 171.28,31.12 2MOC1.6@174.24,31.12
Net3D22_1: 3D22.1 3R60.1 | length 2
  Top Layer w0.3: 3R60.1@189.75,39.76 189.775,39.785 189.775,41.735 3D22.1@189.8,41.76
Net3D22_2: 3D22.2 3MOC1.2 3Q19.3 | length 7.7
  Top Layer w0.3: 3MOC1.2@181.86,44.06 182.01,43.91 185.6,43.91 185.75,43.76 3Q19.3@185.75,43.41 185.75,43.06 187.05,41.76 3D22.2@188.15,41.76
Net3MOC1_1: 3MOC1.1 3R61.1 | length 2.9
  Top Layer w0.5: 3MOC1.1@181.86,41.52 183.84,41.52 184.45,40.91 3R61.1@184.45,40.81
Net3MOC1_4: 3MOC1.4 Q3.3 | length 151.1
  Top Layer w0.5: Q3.3@61,98.6 61.2,98.6 68.75,91.05 68.75,63.2 85.35,46.6 3MOC1.4@174.24,46.6
Net3MOC1_6: 3MOC1.6 R3.1 | length 144
  Top Layer w0.5: R3.1@65.78,88.25 65.78,60.57 84.83,41.52 3MOC1.6@174.24,41.52
Net4D22_1: 4D22.1 4R60.1 | length 2
  Top Layer w0.3: 4R60.1@189.75,50.16 189.775,50.185 189.775,52.135 4D22.1@189.8,52.16
Net4D22_2: 4D22.2 4MOC1.2 4Q19.3 | length 7.7
  Top Layer w0.3: 4MOC1.2@181.86,54.46 182.01,54.31 185.6,54.31 185.75,54.16 4Q19.3@185.75,53.81 185.75,53.46 187.05,52.16 4D22.2@188.15,52.16
Net4MOC1_1: 4MOC1.1 4R61.1 | length 2.9
  Top Layer w0.5: 4MOC1.1@181.86,51.92 183.84,51.92 184.45,51.31 4R61.1@184.45,51.21
Net4MOC1_4: 4MOC1.4 Q4.3 | length 129.8
  Top Layer w0.5: Q4.3@78,98.6 78.2,98.6 85.6,91.2 85.6,63.35 91.95,57 4MOC1.4@174.24,57
Net4MOC1_6: 4MOC1.6 R4.1 | length 122.1
  Top Layer w0.5: R4.1@82.78,88.25 82.78,61.67 92.53,51.92 4MOC1.6@174.24,51.92
Net5D22_1: 5D22.1 5R60.1 | length 2
  Top Layer w0.3: 5R60.1@189.75,60.56 189.775,60.585 189.775,62.535 5D22.1@189.8,62.56
Net5D22_2: 5D22.2 5MOC1.2 5Q19.3 | length 7.7
  Top Layer w0.3: 5MOC1.2@181.86,64.86 182.01,64.71 185.6,64.71 185.75,64.56 5Q19.3@185.75,64.21 185.75,63.86 187.05,62.56 5D22.2@188.15,62.56
Net5MOC1_1: 5MOC1.1 5R61.1 | length 2.9
  Top Layer w0.5: 5MOC1.1@181.86,62.32 183.84,62.32 184.45,61.71 5R61.1@184.45,61.61
Net5MOC1_4: 5MOC1.4 Q5.3 | length 97
  Top Layer w0.5: Q5.3@95,98.6 103.1,90.5 103.1,82.25 113.45,71.9 165.8,71.9 170.3,67.4 5MOC1.4@174.24,67.4
Net5MOC1_6: 5MOC1.6 R5.1 | length 89
  Top Layer w0.5: R5.1@99.78,88.25 99.78,81.72 112.7,68.8 159.85,68.8 166.33,62.32 5MOC1.6@174.24,62.32
Net6D22_1: 6D22.1 6R60.1 | length 2
  Top Layer w0.3: 6R60.1@189.75,70.96 189.775,70.985 189.775,72.935 6D22.1@189.8,72.96
Net6D22_2: 6D22.2 6MOC1.2 6Q19.3 | length 7.7
  Top Layer w0.3: 6MOC1.2@181.86,75.26 182.01,75.11 185.6,75.11 185.75,74.96 6Q19.3@185.75,74.61 185.75,74.26 187.05,72.96 6D22.2@188.15,72.96
Net6MOC1_1: 6MOC1.1 6R61.1 | length 2.9
  Top Layer w0.5: 6MOC1.1@181.86,72.72 183.84,72.72 184.45,72.11 6R61.1@184.45,72.01
Net6MOC1_4: 6MOC1.4 Q6.3 | length 76.1
  Top Layer w0.5: Q6.3@112,98.6 112.2,98.6 120.1,90.7 120.1,81.8 124.1,77.8 6MOC1.4@174.24,77.8
Net6MOC1_6: 6MOC1.6 R6.1 | length 69.2
  Top Layer w0.5: R6.1@116.78,88.25 116.78,79.27 121.4,74.65 170.3,74.65 172.23,72.72 6MOC1.6@174.24,72.72
Net7D22_1: 7D22.1 7R60.1 | length 2
  Top Layer w0.3: 7R60.1@189.75,81.36 189.775,81.385 189.775,83.335 7D22.1@189.8,83.36
Net7D22_2: 7D22.2 7MOC1.2 7Q19.3 | length 7.7
  Top Layer w0.3: 7MOC1.2@181.86,85.66 182.01,85.51 185.6,85.51 185.75,85.36 7Q19.3@185.75,85.01 185.75,84.66 187.05,83.36 7D22.2@188.15,83.36
Net7MOC1_1: 7MOC1.1 7R61.1 | length 2.9
  Top Layer w0.5: 7MOC1.1@181.86,83.12 183.84,83.12 184.45,82.51 7R61.1@184.45,82.41
Net7MOC1_4: 7MOC1.4 Q7.3 | length 57.4
  Top Layer w0.5: Q7.3@129,98.6 129.2,98.6 136.85,90.95 136.85,84.75 138.45,83.15 161.05,83.15 166.1,88.2 7MOC1.4@174.24,88.2
Net7MOC1_6: 7MOC1.6 R7.1 | length 47
  Top Layer w0.5: R7.1@133.78,88.25 133.78,84.37 137.65,80.5 163.05,80.5 165.67,83.12 7MOC1.6@174.24,83.12
Net8D22_1: 8D22.1 8R60.1 | length 2
  Top Layer w0.3: 8R60.1@189.75,91.76 189.775,91.785 189.775,93.735 8D22.1@189.8,93.76
Net8D22_2: 8D22.2 8MOC1.2 8Q19.3 | length 7.7
  Top Layer w0.3: 8MOC1.2@181.86,96.06 182.01,95.91 185.6,95.91 185.75,95.76 8Q19.3@185.75,95.41 185.75,95.06 187.05,93.76 8D22.2@188.15,93.76
Net8MOC1_1: 8MOC1.1 8R61.1 | length 2.9
  Top Layer w0.5: 8MOC1.1@181.86,93.52 183.84,93.52 184.45,92.91 8R61.1@184.45,92.81
Net8MOC1_4: 8MOC1.4 Q8.3 | length 28.3
  Top Layer w0.5: Q8.3@146,98.6 146.096,98.696 174.144,98.696 8MOC1.4@174.24,98.6
Net8MOC1_6: 8MOC1.6 R8.1 | length 25.6
  Top Layer w0.5: R8.1@150.78,88.25 156.05,93.52 8MOC1.6@174.24,93.52
NetC1_2: C1.2 L1.2 U1.8 | length 4.7
  Top Layer w0.5: v1(181.6,6.6) 183.05,6.6 L1.2@183.1,6.55
  Bottom Layer w0.5: U1.8@179.63,7.845 179.649,7.826 181.474,7.826 C1.2@181.5,7.8 181.6,7.7 v1(181.6,6.6)
NetC2_1: C2.1 D1.2 D2.2 R14.2 R16.2 | length 31.4
  Bottom Layer w1: D2.2@3.1,32.8 3.1,34.2 4.2,35.3 10.03,35.3 10.16,35.43 ; R14.2@8.98,54.35 9.85,53.48 C2.1@9.85,45.25 9.85,41.6 10.16,41.29 R16.2@10.16,37 10.16,35.43 ; D1.2@9.1,32.8 10.16,33.86 10.16,35.43
NetC2_2: C2.2 D4.1 Q9.1 | length 9.7
  Bottom Layer w1: Q9.1@3.35,45.25 C2.2@7.85,45.25 7.85,41.135 7.15,40.435 D4.1@7.15,40.3
NetC3_1: C3.1 D2.1 D5.2 R15.2 | length 10.8
  Bottom Layer w1: R15.2@0.1,17.93 C3.1@0.1,21.75 D5.2@0.1,25.7 D2.1@3.1,25.7
NetC3_2: C3.2 D1.1 D3.2 R13.2 | length 11.2
  Bottom Layer w1: R13.2@5.17,17.95 5.135,17.985 5.135,21.715 C3.2@5.1,21.75 5.85,22.5 5.85,25.45 D3.2@6.1,25.7 D1.1@9.1,25.7
NetC7_1: C7.1 R20.2 U2.6 U2.7 | length 6.7
  Top Layer w0.5: U2.6@214.75,13.065 U2.7@214.75,14.335 214.782,14.367 217.418,14.367 C7.1@217.45,14.4 217.5,14.45 217.5,15.6 217.95,16.05 R20.2@218.8,16.05
NetC7_2: C7.2 R21.1 R22.2 | length 4.8
  Top Layer w0.5: C7.2@218.85,14.4 218.875,14.375 220.975,14.375 R21.1@221,14.35 220.9,14.25 220.9,11.9 R22.2@220.8,11.8
NetC8_1: C8.1 P7.1 P7.2 R18.2 R21.2 U2.1 U2.2 | length 35.5
  Top Layer w0.2: R21.2@221,15.85 R21.2@221.05,15.85
  Top Layer w0.5: C8.1@207,15.6 207.003,15.602 209.2,15.602 209.847,15.602 U2.1@209.85,15.605 ; P7.1@211.74,19.9 P7.2@209.2,19.9 209.2,15.697 209.292,15.605 U2.1@209.85,15.605 ; R18.2@221.15,17.6 221.15,15.95 221.05,15.85 221.75,15.85 222.15,15.45 222.15,11.45 219.95,9.25 214,9.25 212.25,11 212.25,13.6 211.515,14.335 U2.2@209.85,14.335 U2.1@209.85,15.605
NetC8_2: C8.2 R24.1 R25.2 | length 4.5
  Top Layer w0.5: R25.2@203.75,13.1 203.7,13.15 203.7,15.55 R24.1@203.65,15.6 C8.2@205.6,15.6
NetC9_1: C9.1 R25.1 U2.3 | length 4.6
  Top Layer w0.5: R25.1@205.25,13.1 C9.1@207.1,13.1 207.117,13.082 209.832,13.082 U2.3@209.85,13.065
NetC10_1: C10.1 R22.1 U2.5 | length 4.6
  Top Layer w0.5: U2.5@214.75,11.795 214.752,11.797 217.498,11.797 C10.1@217.5,11.8 R22.1@219.3,11.8
NetC12_2: C12.2 Q10.3 R27.1 U3.2 U3.5 | length 15.2
  Top Layer w0.5: Q10.3@208.45,24.9 R27.1@208.45,27.5 C12.2@208.45,29.6 208.457,29.607 208.457,33.142 U3.2@208.465,33.15 208.465,35.165 208.915,35.615 210.585,35.615 211.005,36.035 U3.5@211.005,38.05
NetC14_2: C14.2 Q11.2 R31.1 U4.2 U4.5 | length 15
  Top Layer w0.5: Q11.2@221.7,27.2 221.7,27.25 221.65,27.3 219.55,27.3 R31.1@219.45,27.4 C14.2@219.45,29.5 219.403,29.547 219.403,33.012 U4.2@219.365,33.05 219.365,35.065 219.815,35.515 221.485,35.515 221.905,35.935 U4.5@221.905,37.95
NetC16_2: C16.2 C17.2 L3.2 U5.3 | length 7.3
  Top Layer w0.8: U5.3@221.086,57.704 221.136,57.654 C17.2@221.136,55.304 C16.2@221.136,53.304 221.286,53.154 221.286,51.914 222.25,50.95 L3.2@222.25,50.9
NetC18_2: C18.2 C19.2 L4.1 U5.2 U5.4 | length 12.7
  Top Layer w0.5: U5.2@218.786,57.704 U5.4@218.786,63.504
  Top Layer w0.8: L4.1@217.75,51.2 217.75,53.29 C18.2@217.736,53.304 217.886,53.454 C19.2@217.886,55.304 217.886,55.354 218.686,56.154 218.686,57.604 U5.2@218.786,57.704
NetC28_1: C28.1 U10.5 | length 2.3
  Top Layer w0.2: C28.1@224.462,75.762 224.462,75.812 224.838,76.188 U10.5@226.563,76.188
NetC28_2: C28.2 U10.4 | length 4
  Top Layer w0.2: C28.2@223.062,75.762 223.062,75.812 224.088,76.838 U10.4@226.563,76.838
NetC29_1: C29.1 U10.3 | length 2.3
  Top Layer w0.2: C29.1@224.412,77.813 224.712,77.513 226.538,77.513 U10.3@226.563,77.488
NetC29_2: C29.2 U10.1 | length 2.3
  Top Layer w0.2: C29.2@224.412,79.213 225.537,79.213 225.962,78.788 U10.1@226.563,78.788
NetC30_2: C30.2 U10.2 | length 3.2
  Top Layer w0.2: U10.2@226.563,78.138 227.438,78.138 227.7,78.4 227.7,79.975 227.438,80.238 C30.2@227.438,80.288
NetC33_2: C33.2 C34.2 L5.2 U7.9 | length 6.8
  Top Layer w0.3: C34.2@218.65,114.45 218.7,114.45 219.55,115.3 U7.9@221.7,115.3
  Top Layer w0.5: L5.2@215.25,114.45 C33.2@216.95,114.45 C34.2@218.65,114.45
NetC35_2: C35.2 U10.6 | length 4.5
  Top Layer w0.2: U10.6@226.563,75.538 227.987,75.538 228.712,74.813 C35.2@228.712,72.762
NetD3_1: D3.1 D4.2 D5.1 Q9.2 R16.1 | length 22.8
  Bottom Layer w1: Q9.2@2.08,45.25 2.08,42.33 D4.2@0.05,40.3 0.075,40.275 0.075,32.825 D5.1@0.1,32.8 0.1,31.4 1.2,30.3 4.8,30.3 ; 5,30.3 6.1,31.4 D3.1@6.1,32.8
NetD6_1: D6.1 U3.1 | length 4.2
  Top Layer w0.5: D6.1@204.375,30.55 206.325,32.5 207.103,32.5 207.195,32.592 U3.1@207.195,33.15
NetD6_3: D6.3 R27.2 | length 2.3
  Top Layer w0.5: D6.3@206.625,29.6 206.8,29.6 206.85,29.55 206.85,27.6 R27.2@206.95,27.5
NetD7_1: D7.1 R31.2 | length 2.2
  Top Layer w0.5: D7.1@216.925,29.05 217.2,29.05 217.25,29 217.25,28.2 217.95,27.5 R31.2@217.95,27.4
NetD7_3: D7.3 U4.1 | length 5.5
  Top Layer w0.5: D7.3@214.675,30 214.675,31.375 216.35,33.05 U4.1@218.095,33.05
NetD8_1: D8.1 R40.1 | length 1.2
  Top Layer w0.5: D8.1@243.15,11.25 R40.1@243.15,12.45
NetD9_1: D9.1 R41.1 | length 1.2
  Top Layer w0.5: D9.1@244.8,11.25 R41.1@244.8,12.45
NetD10_1: D10.1 P23.4 | length 12.8
  Top Layer w1: P23.4@238.7,4.3 P23.4@238.65,4.25 238.65,14.2 240.4,15.95 D10.1@240.6,15.95 D10.1@240.55,15.9
NetD10_2: D10.2 F9.1 | length 2.4
  Top Layer w1: D10.2@240.6,18.85 F9.1@240.6,21.25
NetD12_1: D12.1 P23.2 | length 12.4
  Top Layer w1: P23.2@231.65,4.25 231.65,14.6 232.6,15.55 232.6,15.75 232.8,15.95 D12.1@233,15.95
NetD12_2: D12.2 F10.1 | length 2.4
  Top Layer w1: F10.1@232.9,21.2 233,21.1 D12.2@233,18.85
NetD15_3: D15.3 R51.1 U10.12 | length 11.9
  Top Layer w0.2: D15.3@227.65,82.575 227.65,82.3 227.75,82.2 230.65,82.2 R51.1@230.9,82.45 ; R51.1@230.9,82.55 R51.1@230.9,82.45 ; U10.12@232.162,76.188 231.012,76.188 230.15,77.05 230.15,78.85 230.9,79.6 R51.1@230.9,82.45
NetD16_1: D16.1 R45.1 | length 1.8
  Top Layer w0.5: D16.1@217.15,76.3 217.175,76.275 217.175,74.525 R45.1@217.2,74.5
NetD16_2: D16.2 Q13.3 | length 2.4
  Top Layer w0.5: Q13.3@215.1,77.2 215.45,77.2 216.05,77.8 217,77.8 D16.2@217.15,77.95
NetD17_1: D17.1 R46.1 | length 1.9
  Top Layer w0.5: D17.1@217.15,81.8 217.175,81.775 217.175,79.925 R46.1@217.2,79.9
NetD17_2: D17.2 Q14.3 | length 2.3
  Top Layer w0.5: Q14.3@215.1,82.8 215.45,82.8 216,83.35 217.05,83.35 D17.2@217.15,83.45
NetD18_1: D18.1 R47.1 | length 1.9
  Top Layer w0.5: R47.1@217.1,86.1 217.125,86.125 217.125,87.975 D18.1@217.15,88
NetD18_2: D18.2 Q15.3 | length 2.4
  Top Layer w0.5: Q15.3@215.1,88.9 215.45,88.9 216.05,89.5 217,89.5 D18.2@217.15,89.65
NetD19_1: D19.1 R48.1 | length 1.8
  Top Layer w0.5: D19.1@217.1,93.8 217.125,93.775 217.125,92.025 R48.1@217.15,92
NetD19_2: D19.2 Q16.3 | length 2.4
  Top Layer w0.5: Q16.3@215.05,94.7 215.4,94.7 216,95.3 216.95,95.3 D19.2@217.1,95.45
NetD20_1: D20.1 R49.1 | length 1.8
  Top Layer w0.5: D20.1@217.1,99.85 217.125,99.825 217.125,98.075 R49.1@217.15,98.05
NetD20_2: D20.2 Q17.3 | length 2.4
  Top Layer w0.5: Q17.3@215.05,100.75 215.4,100.75 216,101.35 216.95,101.35 D20.2@217.1,101.5
NetD21_1: D21.1 R50.1 | length 1.8
  Top Layer w0.5: D21.1@217.1,106 217.125,105.975 217.125,104.225 R50.1@217.15,104.2
NetD21_2: D21.2 Q18.3 | length 2.4
  Top Layer w0.5: Q18.3@215.05,106.95 215.4,106.95 216,107.55 216.95,107.55 D21.2@217.1,107.7
NetOPT1_1: OPT1.1 R14.1 | length 252.4
  Bottom Layer w1: R14.1@-1.18,54.35 -1.18,125.57 7.8,134.55 167.8,134.55 171.31,131.04 OPT1.1@174.79,131.04
NetOPT1_2: OPT1.2 Q9.3 | length 257.1
  Bottom Layer w1: Q9.3@0.81,45.25 0.81,50.66 1.45,51.3 1.45,95.31 1.41,95.35 1.41,124.26 8.85,131.7 166.65,131.7 169.85,128.5 OPT1.2@174.79,128.5
NetOPT1_5: OPT1.5 P3.1 P3.2 R11.2 R12.2 U7.15 | length 60.2
  Top Layer w0.2: OPT1.5@182.41,128.5 186.55,128.5 P3.1@190.55,124.5 P3.2@193.09,124.5 207.3,124.5 208.35,123.45 R11.2@208.35,121.65 208.35,121.5 207.75,120.9 207.75,113.25 209.55,111.45 215.2,111.45 217.8,108.85 v1(218.65,108.85) ; v1(224,108.85) U7.15@224,112.5
  Bottom Layer w0.2: v1(218.65,108.85) v1(224,108.85)
NetP2_2: P2.2 U1.1 U1.2 | length 9.7
  Bottom Layer w3: P2.2@161.32,5.6 169.8,5.6 170.65,6.45
NetP8_1: P8.1 P8.2 P10.2 R19.2 R24.2 | length 22.5
  Top Layer w0.2: P10.2@192.4,9.21 192.59,9.4 194.9,9.4 R19.2@195.15,9.65 197.7,9.65 198.5,10.45 198.5,13.3 202.3,17.1 R24.2@203.65,17.1
  Top Layer w0.5: R24.2@203.65,17.1 203.65,18.65 204.31,19.31 P8.2@205.55,19.31 P8.1@205.55,21.85
NetP9_1: P9.1 P9.2 R23.2 R26.1 U7.14 | length 105.9
  Top Layer w0.2: v1(221.15,100.75) 221.15,73.1 229.35,64.9 229.35,27.45 228.55,26.65 R23.2@228.55,20.95 R26.1@228.55,19.25 228.55,17.36 P9.2@227.69,16.5 P9.1@225.15,16.5 P9.1@225.8,17.15 ; v1(223.5,100.75) U7.14@223.5,112.5
  Bottom Layer w0.2: v1(221.15,100.75) v1(223.5,100.75)
NetP10_1: P10.1 P11.1 P11.2 | length 6.7
  Top Layer w0.5: P10.1@192.4,6.67 192.42,6.65 P11.1@196.6,6.65 P11.2@199.14,6.65
NetP12_1: P12.1 P12.2 R28.1 U3.6 U3.7 | length 10
  Top Layer w0.5: P12.2@208.5,44.54 P12.1@208.5,42 ; U3.6@209.735,38.05 U3.7@208.465,38.05 208.5,38.085 P12.1@208.5,42 ; R28.1@210.7,42.05 208.55,42.05 P12.1@208.5,42
NetP15_1: P15.1 P15.2 R32.1 U4.6 U4.7 | length 10
  Top Layer w0.5: P15.2@219.4,44.44 P15.1@219.4,41.9 ; U4.6@220.635,37.95 U4.7@219.365,37.95 219.365,41.865 P15.1@219.4,41.9 ; R32.1@221.6,42 219.5,42 P15.1@219.4,41.9
NetP17_1: P17.1 P17.2 Q12.1 U7.16 | length 59
  Top Layer w0.2: v1(220.65,94.3) 220.65,69.25 P17.1@221.1,68.8 P17.2@223.64,68.8 227.9,64.54 227.9,61.9 Q12.1@227.85,61.85 ; v1(224.5,94.3) U7.16@224.5,112.5
  Bottom Layer w0.2: v1(220.65,94.3) v1(224.5,94.3)
NetP20_2: P20.2 R36.2 | length 2.3
  Top Layer w0.2: R36.2@240.35,104.38 P20.2@242.61,104.38
NetP20_4: P20.4 R37.2 | length 2.3
  Top Layer w0.2: R37.2@240.35,106.92 P20.4@242.61,106.92
NetP20_6: P20.6 R38.2 | length 2.3
  Top Layer w0.2: R38.2@240.35,109.46 P20.6@242.61,109.46
NetP20_8: P20.8 R39.2 | length 2.3
  Top Layer w0.2: R39.2@240.35,112 P20.8@242.61,112
NetQ1_1: Q1.1 Q2.1 Q3.1 Q4.1 Q5.1 Q6.1 Q7.1 Q8.1 U1.3 U1.4 | length 331.2
  Bottom Layer w3: Q1.1@22,99.3 22,106.25 27.45,111.7 140.95,111.7 ; Q2.1@39,99.3 39,111.65 ; Q3.1@56,99.3 56,111.65 ; Q4.1@73,99.3 73,111.65 ; Q5.1@90,99.3 90,111.65 ; Q6.1@107,99.3 107,111.65 ; Q7.1@124,99.3 124,111.65 ; Q8.1@141,99.3 141,111.65 140.95,111.7 ; 170.6,13.1 161.8,21.9 161.8,100.45 150.55,111.7 140.95,111.7
NetQ10_1: Q10.1 Q11.1 Q12.3 R29.1 | length 50
  Top Layer w0.2: v1(219.5,24.35) 220.35,24.35 222.65,26.65 223.4,26.65 223.6,26.85 Q11.1@223.6,27.2 ; v1(226.2,30.15) 226.9,30.85 R29.1@226.9,57.65 Q12.3@226.9,59.75
  Top Layer w0.5: Q10.1@210.55,23.95 214.95,23.95 215.35,24.35 v1(216.35,24.35) ; Q11.1@223.6,27.2 v1(226.2,27.2)
  Bottom Layer w0.2: v1(216.35,24.35) v1(219.5,24.35) ; v1(226.2,27.2) v1(226.2,30.15)
NetQ11_3: Q11.3 R34.2 R35.1 | length 3.3
  Top Layer w0.5: Q11.3@222.65,25.1 R34.2@222.65,23.25 R35.1@224.15,23.25
NetR9_1: R9.1 R10.2 U1.6 | length 5.5
  Top Layer w0.5: v1(182.6,10.4) R9.1@183.6,10.4 R10.2@183.6,11.9
  Bottom Layer w0.5: U1.6@179.63,10.385 179.645,10.4 v1(182.6,10.4)
NEUTRAL: P1.1 P2.1 R15.1 | length 161.4
  Bottom Layer w1: R15.1@0.1,7.77 2.47,5.4 P1.1@45.02,5.4
  Bottom Layer w3: P1.1@45.02,5.4 45.02,2.33 47.85,-0.5 147.6,-0.5 P2.1@153.7,5.6
NRST: C21.2 P19.5 R44.1 U7.7 U9.2 | length 58.6
  Top Layer w0.2: U9.2@211.25,115.5 212.7,115.5 C21.2@212.75,115.45 ; 213.2,115.45 218.55,115.45 219.4,116.3 U7.7@221.7,116.3
  Top Layer w0.3: U9.2@211.25,115.5 R44.1@211.25,117.35 211.25,125.6 217.4,131.75 241.15,131.75 P19.5@245.15,127.75
RS_232_RX: P25.2 R51.2 U10.13 | length 16.8
  Top Layer w0.2: U10.13@232.162,76.838 232.175,76.85 v1(236.7,76.85) ; R51.2@232.4,82.55 232.4,82.45 232.65,82.2 v1(233.15,82.2)
  Bottom Layer w0.2: v1(233.15,82.2) 235.6,79.75 P25.2@239.4,79.75 239.4,79.55 v1(236.7,76.85)
RS_232_TX: P25.3 R52.2 U10.14 | length 18.5
  Top Layer w0.2: R52.2@231.65,81.15 v1(232.75,81.15) ; U10.14@232.162,77.488 238.162,77.488 P25.3@239.4,76.25
  Bottom Layer w0.2: v1(232.75,81.15) 232.8,81.1 233.3,81.1 235.75,78.65 235.75,76.925 236.425,76.25 P25.3@239.4,76.25
ST_X24MIN: C31.1 U7.5 Y1.1 | length 8.2
  Top Layer w0.2: Y1.1@216.15,119.55 Y1.1@216.15,119.45 ; C31.1@216.15,121.1 Y1.1@216.15,119.45 ; U7.5@221.7,117.3 220,117.3 218.55,118.75 216.85,118.75 Y1.1@216.15,119.45
ST_X24MOUT: C32.1 U7.6 Y1.3 | length 6.1
  Top Layer w0.2: C32.1@217.55,116.4 Y1.3@217.55,117.85 ; Y1.3@217.55,117.95 218.65,117.95 219.8,116.8 U7.6@221.7,116.8
SW1: SW1.3 SW1.4 U7.26 | length 90.8
  Top Layer w0.2: U7.26@229.8,114.3 229.819,114.281 230.769,114.281 234.4,110.65 234.4,102.85 243.6,93.65 243.6,38.95 SW1.4@245.5,37.05 SW1.3@245.5,30.55
SW2: SW2.3 SW2.4 U7.27 | length 82.4
  Top Layer w0.2: U7.27@229.8,114.8 229.819,114.781 231.269,114.781 235.35,110.7 235.35,103.6 244.2,94.75 244.2,61.05 244.2,47.55 SW2.4@245.5,46.25 SW2.3@245.5,39.75
SW3: SW3.3 SW3.4 U7.28 | length 73.9
  Top Layer w0.2: U7.28@229.8,115.3 231.55,115.3 235.95,110.9 235.95,104.4 245.5,94.85 SW3.4@245.5,55.45 SW3.3@245.5,48.95
SYS_SWCLK: P19.2 U7.37 | length 18.6
  Top Layer w0.2: U7.37@228.5,120.6 228.5,121.35 229.3,122.15 243.13,122.15 P19.2@245.15,120.13
SYS_SWDIO: P19.4 U7.34 | length 21
  Top Layer w0.2: U7.34@229.8,118.3 v1(243.05,118.3)
  Bottom Layer w0.2: v1(243.05,118.3) 243.05,123.11 P19.4@245.15,125.21
USART1_RX: D15.1 R42.1 U7.13 U8.1 | length 30.7
  Top Layer w0.2: U7.13@223,112.5 223,94.65 R42.1@224.35,93.3 U8.1@224.35,91.205 225.545,91.205 226.6,90.15 226.6,87.55 228.4,85.75 228.4,85.025 D15.1@228.6,84.825
USART1_TX: R43.1 R52.1 U7.12 U8.4 U10.11 | length 48
  Top Layer w0.2: U7.12@221.7,113.8 221.7,88.05 R43.1@222.35,87.4 ; R43.1@222.46,87.39 222.455,87.395 U8.4@224.35,87.395 224.35,82.9 225.8,81.45 229.9,81.45 230.15,81.2 R52.1@230.15,81.15 230.15,81.05 229.05,79.95 229.05,76.9 230.412,75.538 U10.11@232.162,75.538
VIOUT: P10.3 R19.1 U1.7 | length 16.9
  Top Layer w0.5: P10.3@192.4,11.75 194.45,11.75 195.05,11.15 R19.1@195.15,11.15
  Bottom Layer w0.5: U1.7@179.63,9.115 187.915,9.115 190.55,11.75 P10.3@192.4,11.75
VIOUT_FILT: P6.1 P6.2 R18.1 R20.1 R23.1 U3.3 U4.3 | length 48.5
  Top Layer w0.5: U3.3@209.735,33.15 209.735,32.25 210.785,31.2 212.15,31.2 212.75,30.6 212.75,29.9 217.6,25.05 P6.2@217.6,19.95 ; R20.1@218.8,17.55 218.7,17.55 218.6,17.65 218.6,17.75 217.791,18.559 217.791,19.759 P6.2@217.6,19.95 ; U4.3@220.635,33.05 220.635,32.15 221.735,31.05 223.9,31.05 227.05,27.9 R23.1@227.05,20.95 227.05,20.85 226.95,20.75 226.85,20.75 226.05,19.95 222.7,19.95 ; R18.1@222.65,17.6 222.65,19.9 222.7,19.95 ; P6.2@217.6,19.95 P6.1@220.14,19.95 222.7,19.95
VIOUT_NEG_PEAK: P16.1 P16.2 R32.2 R33.1 U7.11 | length 90.7
  Top Layer w0.2: R32.2@221.6,43.5 221.6,44.9 219.7,46.8 212.9,46.8 211.4,48.3 211.4,62.55 220.05,71.2 220.05,113.7 220.65,114.3 U7.11@221.7,114.3
  Top Layer w0.5: R32.2@221.6,43.5 R33.1@223.1,43.5 224.04,44.44 225.5,44.44 P16.1@225.5,42.05 P16.1@225.5,41.9
VIOUT_POS_PEAK: P13.1 P13.2 R28.2 R30.1 U7.10 | length 83.5
  Top Layer w0.2: R28.2@210.7,43.55 210.7,63 219.5,71.8 219.5,114 220.3,114.8 U7.10@221.7,114.8
  Top Layer w0.5: R28.2@210.7,43.55 R30.1@212.2,43.55 213.24,44.59 P13.2@214.65,44.59 P13.1@214.65,42.05
pads on no net: 1MOC1.3 1MOC1.5 2MOC1.3 2MOC1.5 3MOC1.3 3MOC1.5 4MOC1.3 4MOC1.5 5MOC1.3 5MOC1.5 6MOC1.3 6MOC1.5 7MOC1.3 7MOC1.5 8MOC1.3 8MOC1.5 D6.2 D7.2 D15.2 MH1.1 MH2.1 MH3.1 MH4.1 MH5.1 MH6.1 MH7.1 MH8.1 MH9.1 MH10.1 MH11.1 MH12.1 MH13.1 MH14.1 MH15.1 MH16.1 OPT1.3 OPT1.6 P19.6 U8.8 U10.7 U10.8 U10.9 U10.10
copper on no net: | length 2.1
  Top Layer w0.5: v1(208.25,47.5) v1(208.25,49.6)

## Polygon pours and split planes (outlines as drawn)
NetC18_2 on Top Layer "NETC18_2_L01_P026" (solid, pour order 26): 220.946,66.804 224.136,63.614 224.136,59.054 213.086,59.054 213.086,63.554 216.336,66.804
GND on Bottom Layer "GND_BOTTOM_LAYER" (solid, remove dead copper, pour order 36): 203.854,-1.463 190.362,-1.463 183.65,5.25 183.65,14 188.55,18.9 188.55,129.4 196.65,137.5 245.05,137.5 246.05,136.5 245.554,136.004 245.554,103.537 245.554,-1.462
GND_A on Bottom Layer "Bottom Layer-GND_A" (solid, pour order 2): 228.05,45.75 232.55,41.25 232.55,35.2 229.2,31.85 229.2,23.1 229.2,14.85 227.8,13.45 220.3,5.95 204.65,5.95 204.6,5.95 203.15,7.4 203.15,45.75
NetQ1_1 on Bottom Layer "Top Layer-NetP2_2" (solid, pour order 34): 175.13,12.05 174.782,12.05 cw(c174.782,14.59) 172.986,12.794 172.43,13.35 171.13,14.65 168.93,14.65 168.43,14.15 168.43,13.15 170.03,11.55 170.923,10.657 ccw(c172.63,12.364) 172.63,9.95 175.13,9.95
NetP2_2 on Bottom Layer "Top Layer-NetP2_2" (solid, pour order 28): 175.13,7.45 174.782,7.45 ccw(c174.782,4.91) 172.986,6.706 172.43,6.15 171.13,4.85 168.93,4.85 168.43,5.35 168.43,6.35 170.03,7.95 170.923,8.843 cw(c172.63,7.136) 172.63,9.55 175.13,9.55
no net on Bottom Solder "Top Layer-NetP2_2" (solid): 175.13,12.05 174.782,12.05 cw(c174.782,14.59) 172.986,12.794 172.43,13.35 171.13,14.65 168.93,14.65 168.43,14.15 168.43,13.15 170.03,11.55 170.923,10.657 ccw(c172.63,12.364) 172.63,9.95 175.13,9.95
no net on Bottom Solder "Top Layer-NetP2_2" (solid): 175.13,7.45 174.782,7.45 ccw(c174.782,4.91) 172.986,6.706 172.43,6.15 171.13,4.85 168.93,4.85 168.43,5.35 168.43,6.35 170.03,7.95 170.923,8.843 cw(c172.63,7.136) 172.63,9.55 175.13,9.55

## Silkscreen, mask and mechanical layers (free items; w line width, h text height)
Top Overlay:
  lines w0.1: -1,106.5 -1,131.5 169,131.5 169,106.5 -1,106.5
  lines w0.254: 244.4,82.75 246.6,82.75 ; 244.4,90.7 246.6,90.7 ; 245.5,82.75 245.5,84.25 ; 245.5,90.7 245.5,92.2
  text "D" at 244.8,87.05 h1.52
  text "RX" at 243.9,78.75 h1.52
  text "TX" at 243.9,75.25 h1.52
  text "5V" at 243.9,71.75 h1.52
  text "N" at 149.827,12.3 h1.52
  text "L" at 157.447,12.3 h1.52
  text "N" at 44.258,12.1 h1.52
  text "PH.1" at 48.767,12.1 h1.52
  text "PH.2" at 56.387,12.1 h1.52
  text "PH.3" at 64.007,12.1 h1.52
  text "PH.4" at 71.627,12.1 h1.52
  text "PH.5" at 79.247,12.1 h1.52
  text "PH.6" at 86.867,12.1 h1.52
  text "PH.7" at 94.487,12.1 h1.52
  text "PH.8" at 102.107,12.1 h1.52
  text "GND" at 229.1,8.8 h1.52 r90
  text "+5V" at 232.6,8.8 h1.52 r90
  text "GND" at 236.1,8.8 h1.52 r90
  text "+12V" at 239.6,8.8 h1.52 r90
Mechanical 4:
  drawing of 283 lines, arcs and shapes, not listed
  text "Board Outline + Cutouts" at 69.3,139.7 h1.52
Mechanical 20 (Mech20):
  text "Board Info Layer: / - SIze - 250mm x 141mm / - Layer Count - 2 / - Copper Thickness - 1oz / - Finish - ENIG / - PCB Color - green / - PCB  Thickness - 2mm" at 258.85,107.9 h1.52